# Altium PCB Shutdown.PcbDoc
Units mil, origin at the board's own origin, x right, y up, seen from the top; angles counter-clockwise.
Board outline 6000 x 4000 mil, 2 copper layers (Top Layer, Bottom Layer); 67 components, 38 nets, 88 pads, 0 vias.
Unrouted connection lines stored in the file: 57.
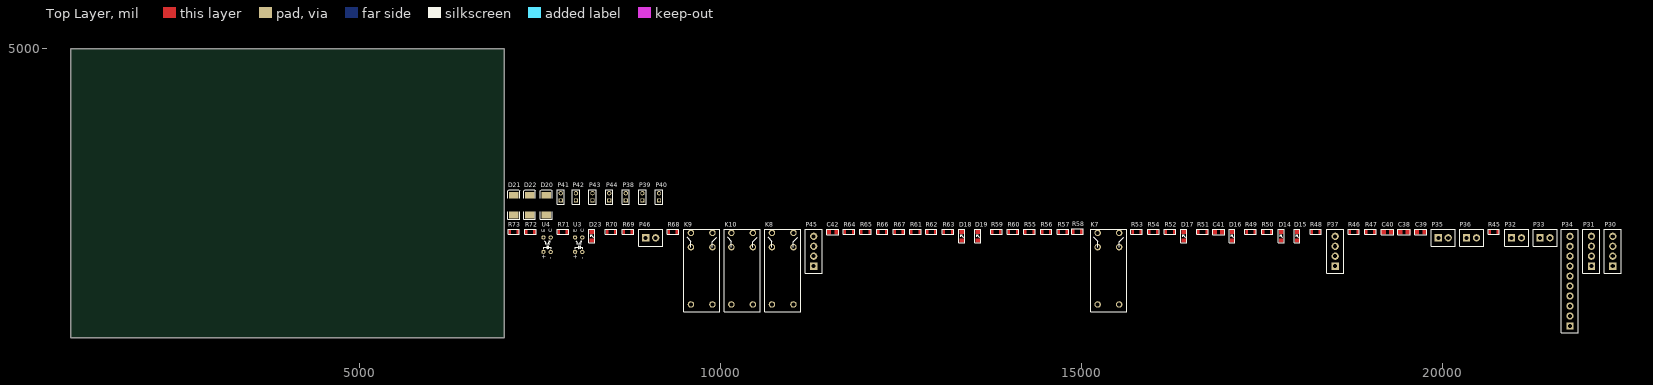
[diagram p0: Top Layer view]
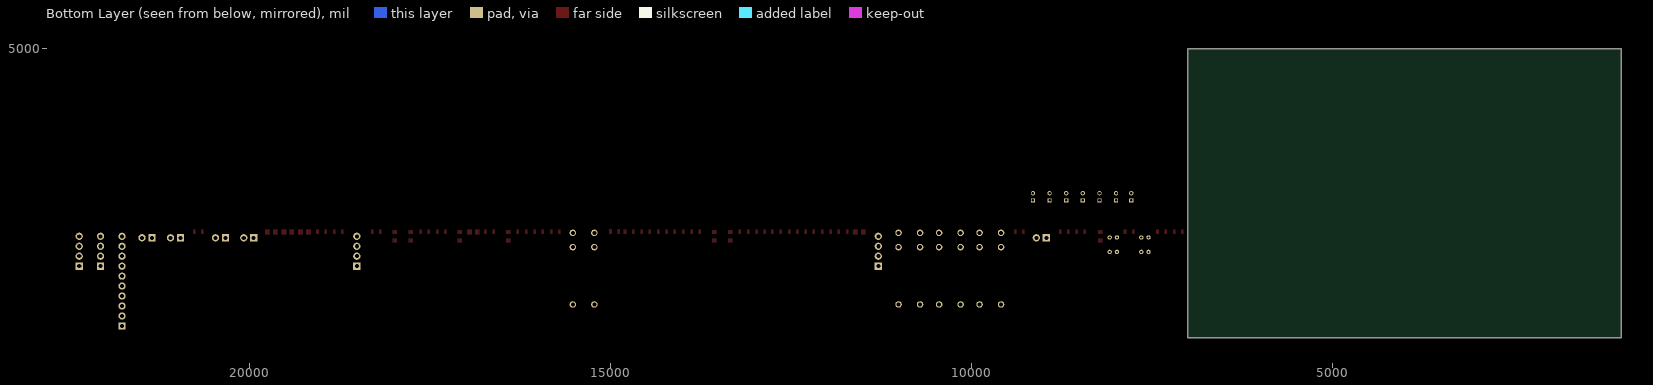
[diagram p1: Bottom Layer view, seen from below]

## Layer stack, top to bottom
Top Solder: solder mask 0.4, Solder Resist, Dk 3.5
Top Layer: signal copper 1.4
Dielectric 1: dielectric 12.6, FR-4, Dk 4.8
Bottom Layer: signal copper 1.4
Bottom Solder: solder mask 0.4, Solder Resist, Dk 3.5

## Board outline
1000,1000 7000,1000 7000,5000 1000,5000

## Design rules (kind name [scope] priority, off if disabled: settings)
Clearance [All] p1: gap=10 ignorepadtopadclearanceinfootprint=FALSE except(0: Arc-Hole Track-Hole SMDPad-Hole THPad-Hole Via-Hole Fill-Hole Poly-Hole Region-Hole Text-Hole)
PolygonConnect [All] p1: connectstyle=Relief reliefconductorwidth=10 reliefentries=4 polygonreliefangle="90 Angle" airgapwidth=10
RoomDefinition Shutdown [InComponentClass('Shutdown')] p1: confinementstyle=ConfineIn formatcopy=TRUE lockcomponents=FALSE outline 7045,2626 9279,2626 9279,3158 7045,3158
RoutingVias [All] p1: holewidth=28 width=50 viastyle="Through Hole" minholewidth=28 minwidth=50 maxholewidth=28 maxwidth=50
SolderMaskExpansion [All] p1: expansion=4
Width [All] p1: maxlimit=10 minlimit=10 preferedwidth=10
30 further rules are at their usual default settings.

## Components (designator, comment, footprint, x,y, rotation, side; value= is the part's Value field where it differs from the comment)
C38 "Cap" "SMD Capacitor" 19375,2427 r0 top value=100nF
C39 "Cap" "SMD Capacitor" 19606,2427 r0 top value=100nF
C40 "Cap" "SMD Capacitor" 19145,2427 r0 top value=100nF
C41 "Cap" "SMD Capacitor" 16807,2427 r0 top value=100nF
C42 "Cap" "SMD Capacitor" 11463,2427 r0 top value=100nF
D14 "LED1" "SMD LED" 17792,2319 r90 top
D15 "LED1" "SMD LED" 18012,2319 r90 top
D16 "LED1" "SMD LED" 17112,2319 r90 top
D17 "LED1" "SMD LED" 16445,2319 r90 top
D18 "LED1" "SMD LED" 13370,2319 r90 top
D19 "LED1" "SMD LED" 13590,2319 r90 top
D20 "Diode" SMC 7585,2835 r90 top
D21 "Diode" SMC 7135,2835 r90 top
D22 "Diode" SMC 7355,2835 r90 top
D23 "LED1" "SMD LED" 8247,2319 r90 top
K7 "RT444012F-ND" "Relay DPST" 15121,1359 r90 top
K8 "RT444012F-ND" "Relay DPST" 10610,1359 r90 top
K9 "RT444012F-ND" "Relay DPST" 9489,1359 r90 top
K10 "RT444012F-ND" "Relay DPST" 10049,1359 r90 top
P30 "277-5738-ND" "4 Pin Header-3.5mm" 22352,1989 r90 top
P31 "277-5738-ND" "4 Pin Header-3.5mm" 22056,1989 r90 top
P32 "PV Limit Switch" "2 Pin Header-3.5mm" 20951,2382 r0 top
P33 "HVD Interlock" "2 Pin Header-3.5mm" 21344,2382 r0 top
P34 "277-5774-ND" "10 Pin Header-3.5mm" 21759,1162 r90 top
P35 "HV Master Switch" "2 Pin Header-3.5mm" 19936,2382 r0 top
P36 "EStop1" "2 Pin Header-3.5mm" 20328,2382 r0 top
P37 "PR142C1000-137" "4 Pin Header-3.5mm" 18509,1989 r90 top
P38 "Jumper" HDR1X2 8686,2899 r90 top
P39 "Jumper" HDR1X2 8916,2899 r90 top
P40 "Jumper" HDR1X2 9147,2899 r90 top
P41 "Jumper" HDR1X2 7785,2899 r90 top
P42 "Jumper" HDR1X2 7995,2899 r90 top
P43 "Jumper" HDR1X2 8225,2899 r90 top
P44 "Jumper" HDR1X2 8456,2899 r90 top
P45 "277-5738-ND" "4 Pin Header-3.5mm" 11288,1989 r90 top
P46 "Inertia Switch-NC" "2 Pin Header-3.5mm" 8962,2382 r0 top
R45 "Res1" "SMD Resistor" 20704,2465 r0 top value=1K
R46 "Res1" "SMD Resistor" 18766,2465 r0 top value=1K
R47 "Res1" "SMD Resistor" 18996,2465 r0 top value=1K
R48 "Res1" "SMD Resistor" 18239,2465 r0 top value=1K
R49 "Res1" "SMD Resistor" 17338,2465 r0 top value=1K
R50 "Res1" "SMD Resistor" 17568,2465 r0 top value=1K
R51 "Res1" "SMD Resistor" 16671,2465 r0 top value=1K
R52 "Res1" "SMD Resistor" 16221,2465 r0 top value=1K
R53 "Res1" "SMD Resistor" 15760,2465 r0 top value=.3793K
R54 "Res1" "SMD Resistor" 15990,2465 r0 top value=1K
R55 "Res1" "SMD Resistor" 14277,2465 r0 top value=.3793K
R56 "Res1" "SMD Resistor" 14508,2465 r0 top value=1K
R57 "Res1" "SMD Resistor" 14738,2465 r0 top value=.3793K
R58 "Res1" "SMD Resistor" 14939,2469 r0 top value=1K
R59 "Res1" "SMD Resistor" 13817,2465 r0 top value=.3793K
R60 "Res1" "SMD Resistor" 14047,2465 r0 top value=1K
R61 "Res1" "SMD Resistor" 12698,2465 r0 top value=1K
R62 "Res1" "SMD Resistor" 12916,2465 r0 top value=1K
R63 "Res1" "SMD Resistor" 13146,2465 r0 top value=2K
R64 "Res1" "SMD Resistor" 11776,2465 r0 top value=.3793K
R65 "Res1" "SMD Resistor" 12006,2465 r0 top value=1K
R66 "Res1" "SMD Resistor" 12237,2465 r0 top value=.3793K
R67 "Res1" "SMD Resistor" 12467,2465 r0 top value=1K
R68 "Res1" "SMD Resistor" 9337,2465 r0 top value=1K
R69 "Res1" "SMD Resistor" 8714,2465 r0 top value=.3793K
R70 "Res1" "SMD Resistor" 8483,2465 r0 top value=1K
R71 "Res1" "SMD Resistor" 7815,2465 r0 top value=1K
R72 "Res1" "SMD Resistor" 7365,2465 r0 top value="180 Ohm"
R73 "Res1" "SMD Resistor" 7134,2465 r0 top value="48.7 Ohm"
U3 "425-2767-ND" PC817 8084,2187 r90 top
U4 "425-2767-ND" PC817 7646,2187 r90 top

## Footprints (in the part's own frame and the unit in brackets; to place one, negate y for a bottom-side part, rotate by r counter-clockwise, add the part's x,y. Pads: shape width x height; smd on the part's side, far side on the other; paste and mask are expansions set on the pad)
"2 Pin Header-3.5mm" [mil]
  rect 100x100 hole 56: 1(0,0)
  round 100 hole 56: 2(137.79,0)
  silkscreen extent -96,-118 236,118
"4 Pin Header-3.5mm" [mil]
  rect 100x100 hole 56: 1(0,0)
  round 100 hole 56: 2(137.8,0) 3(275.59,0) 4(413.39,0)
  silkscreen extent -96,-118 512,118
"10 Pin Header-3.5mm" [mil]
  rect 100x100 hole 56: 1(0,0)
  round 100 hole 56: 2(137.8,0) 3(275.59,0) 4(413.38,0) 5(551.18,0) 6(688.97,0) 7(826.77,0) 8(964.57,0) 9(1102.36,0) 10(1240.16,0)
  silkscreen extent -96,-118 1339,118
HDR1X2 [mm] "Connector; Header; 2 Position"
  rect 1.5x1.5 hole 0.9: 1(0,0)
  round 1.5 hole 0.9: 2(2.54,0)
  silkscreen extent -1.27,-1.27 3.81,1.27
PC817 [mil] "Opto-Coupler"
  round 60 hole 30: 1(0,100) 2(0,0) 3(200,0) 4(200,100)
  silkscreen extent 44,-6 155,99
"Relay DPST" [mil]
  round 90 hole 55: 1(892.91,-99.21) 2(1091.34,-99.21) 3(892.91,-396.85) 4(1091.34,-396.85) 5(99.21,-99.21) 6(99.21,-396.85)
  silkscreen extent 0,-500 1142,0
SMC [mm] "DO-214-AB/SMC; 2 C-Bend Leads; Body 7.9 x 5.9 mm, inc. leads (LxW)"
  rect 2.4x3.3 smd: 1(-3.475,0) 2(3.475,0)
  silkscreen extent -5.07,-2.05 5.43,2.05
"SMD Capacitor" [mil]
  Top Layer region: 0,0 65,0 65,68 0,68
  Top Layer region: 110,0 175,0 175,68 110,68
  silkscreen extent 3,-5 172,73
"SMD LED" [mil]
  Top Layer region: 0,0 55.12,0 55.12,63 0,63
  Top Layer region: 118.11,0 173.23,0 173.23,63 118.11,63
  silkscreen extent -9,-9 182,72
"SMD Resistor" [mil]
  Top Layer region: 39.5,-31.5 74.5,-31.5 74.5,31.5 39.5,31.5
  Top Layer region: -74.5,-31.5 -39.5,-31.5 -39.5,31.5 -74.5,31.5
  silkscreen extent -79,-36 79,36

## Part data
C38 C39 C40 C41 C42: "Capacitor", LatestRevisionDate=17-Jul-2002, LatestRevisionNote="Re-released for DXP Platform.", PackageDescription="Radial Cap, Thru-Hole; 2 Leads; 0.3 in Pin Spacing", PackageReference=RAD-0.3, Published=8-Jun-2000, Publisher="Altium Limited"
D14 D15 D16 D17 D18 D19 D23: "Typical RED GaAs LED", LatestRevisionDate=08-Jul-2005, LatestRevisionNote="Mech Layer 1 removed.", PackageDescription="LED; 2 Leads", PackageReference=LED-1, Published=8-Jun-2000, Publisher="Altium Limited"
D20 D21 D22: "Default Diode", Code_JEDEC=DO-214-AB, LatestRevisionDate=17-Jul-2002, LatestRevisionNote="Re-released for DXP Platform.", PackageDescription="DO-214-AB/SMC; 2 C-Bend Leads; Body 7.9 x 5.9 mm, inc. leads (LxW)", PackageReference=SMC, PackageVersion=Sep-1996, Published=8-Jun-2000, Publisher="Altium Limited"
K7 K8 K9 K10: library part Relay-DPST, "Dual-Pole Single-Throw Relay", LatestRevisionDate=17-Jul-2002, LatestRevisionNote="Re-released for DXP Platform.", PackageReference=MODULE6, Published=24-Mar-1999, Publisher="Altium Limited"
P30 P31 P37 P45: library part "Header 4", "Header, 4-Pin", LatestRevisionDate=17-Jul-2002, LatestRevisionNote="Re-released for DXP Platform.", Publisher="Altium Limited"
P32 P33 P35 P36 P46: library part "Header 2", "277-5733-ND", LatestRevisionDate=17-Jul-2002, LatestRevisionNote="Re-released for DXP Platform.", Publisher="Altium Limited"
P34: library part "Header 10", "Header, 10-Pin", LatestRevisionDate=17-Jul-2002, LatestRevisionNote="Re-released for DXP Platform.", Publisher="Altium Limited"
P38 P39 P40 P41 P42 P43 P44: library part "Header 2", "S9001-ND", LatestRevisionDate=17-Jul-2002, LatestRevisionNote="Re-released for DXP Platform.", Publisher="Altium Limited"
R45 R46 R47 R48 R49 R50 R51 R52 R53 R54 R55 R56 R57 R58 R59 R60 R61 R62 R63 R64 R65 R66 R67 R68 R69 R70 R71 R72 R73: "Resistor", LatestRevisionDate=17-Jul-2002, LatestRevisionNote="Re-released for DXP Platform.", PackageDescription="Axial Device, Thru-Hole; 2 Leads; 0.3 in Pin Spacing", PackageReference=AXIAL-0.3, Published=8-Jun-2000, Publisher="Altium Limited"
U3 U4: library part PC817

## Nets (pads, with @x,y where several pads share a name; then routed paths per layer and width w, separated by ;. In a path a pad name is that pad's centre, name@x,y a point inside that pad or via, vN(x,y) a via of type N, cw(c..) or ccw(c..) an arc to the next point about the centre after c; other vN are vias at no path point)
BMS_STAT_FDBK: P34.4
BMS_Status: K7.1 K9.4 P31.2 P34.8 P37.4
E_STOP_FDBK: P34.2
HV_EN_FDBK: P34.6
HVD_Status: P34.7
IMD_STAT_FDBK: P34.5
IMD_Status: P31.3 P34.9 U4.1
LV_BAT+: D20.2 D21.2 D22.2 K8.5 K9.6 K10.6 P30.1 P35.1
MCU_HV_EN: P31.4 U3.1
MSTR_SW_FDBK: P34.1
NetC38_1: P32.1 P36.2 P38.1 P39.2
NetC38_2: 
NetC39_1: P32.2 P33.1 P39.1 P40.2
NetC39_2: 
NetC40_2: 
NetC41_2: 
NetC42_1: K8.4 P44.2 P45.1 P45.3
NetC42_2: 
NetD14_1: 
NetD15_1: 
NetD16_1: 
NetD17_1: 
NetD18_1: 
NetD20_1: D20.1 K8.6 U3.4
NetD23_1: 
NetK8_3: K8.3 P43.2 P44.1 P46.1
NetK9_1: K9.1 P33.2 P40.1 P41.1
NetK9_2: K9.2 K10.1 P41.2 P42.1
NetK10_2: K10.2 P42.2 P43.1 P46.2
NetK10_4: K10.4 U4.4
NetP35_2: P35.2 P36.1 P38.2
NetR72_1: U3.2
NetR73_1: U4.2
PB_NO2: D21.1 K7.2 K9.3 K9.5 P37.3
PB_NO3: K7.3 K7.6 P30.4 P34.10 P37.2 P45.2 P45.4 U3.3 U4.3
PB_NO4: D22.1 K7.4 K10.3 K10.5 P37.1
PV_LIM_FDBK: P34.3
Software_Reset: K7.5 P31.1
pads on no net: K8.1 K8.2 P30.2 P30.3

## Text inside footprints (layer, text, board x,y; h text height)
U3: Top Overlay "C" at 8109,2462 h50 r90; Top Overlay "E" at 8009,2462 h50 r90; Top Overlay "-" at 8114,2087 h60 r90; Top Overlay "+" at 8014,2087 h60 r90
U4: Top Overlay "C" at 7671,2462 h50 r90; Top Overlay "E" at 7571,2462 h50 r90; Top Overlay "-" at 7676,2087 h60 r90; Top Overlay "+" at 7576,2087 h60 r90